# Altium PCB interface.PcbDoc (part 2 of 2)
Units mm, origin at the board's own origin, x right, y up, seen from the top; angles counter-clockwise.
Board outline 50 x 100 mm, 4 copper layers (Top Copper, GND, Supply, Bot Copper), stack 1.56 mm thick; 82 components, 62 nets, 291 pads, 101 vias.
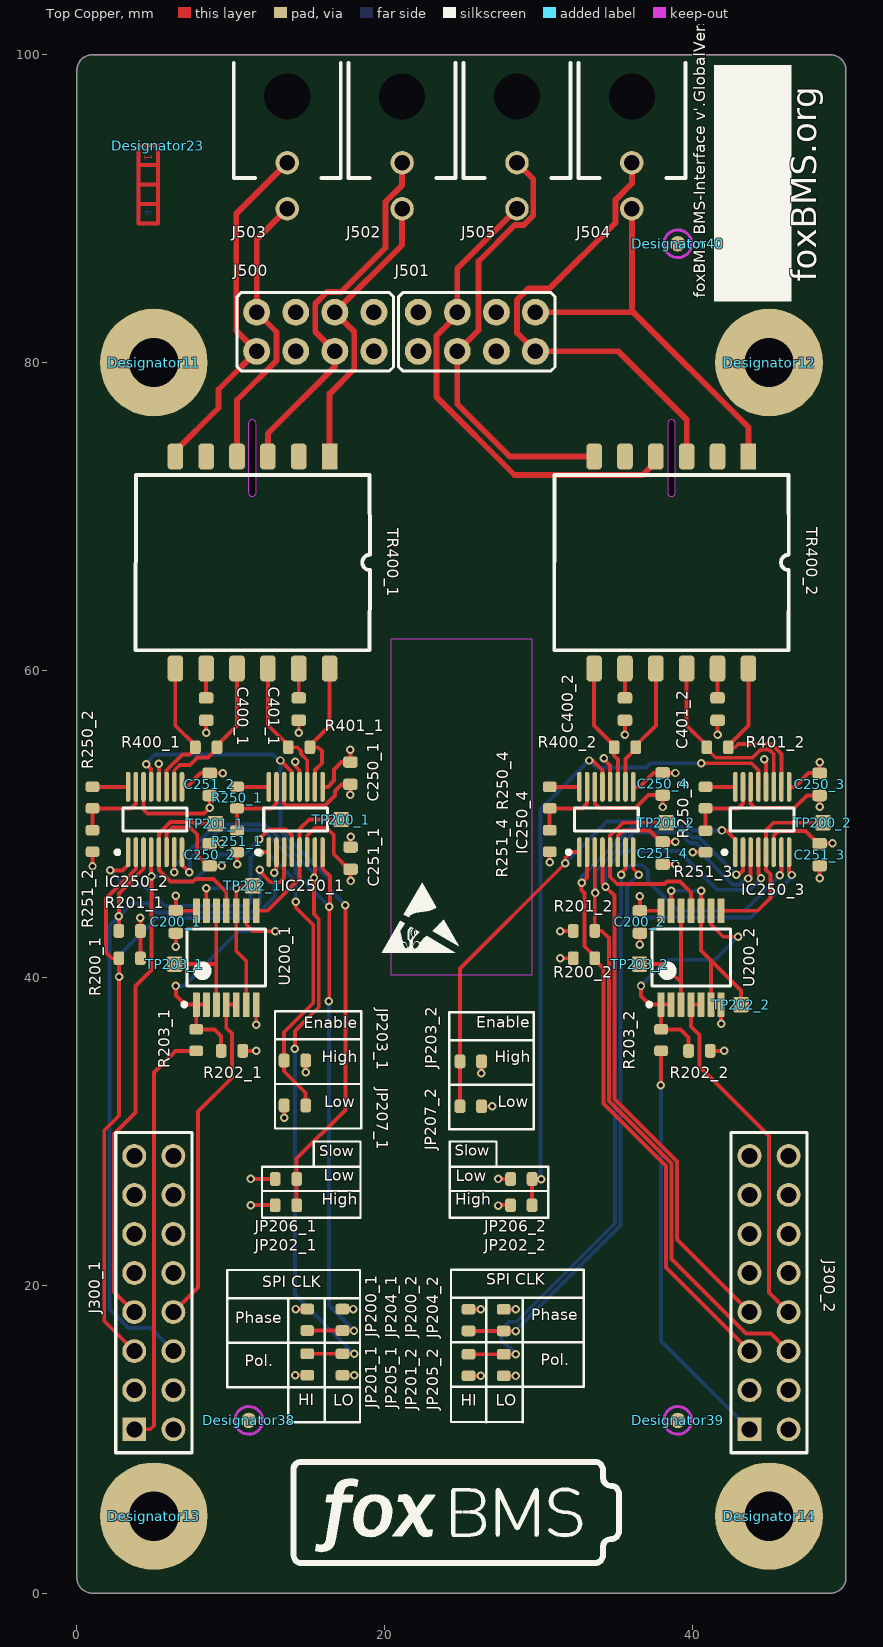
[diagram p0: Top Copper view]

## Silkscreen, mask and mechanical layers (free items; w line width, h text height) (continued)
Bottom Overlay: (continued)
  text "forward" at 37.925,87.826 h1.27
  text "foxBMS.org" at 1.524,85.217 h2.76 r270
  text "WARNING: Do not exceed 600V pack voltage with connected reverse isoSPI!" at 43,65.82 h2
  text "foxBMS BMS-Interface v'.GlobalVersion'" at 31.496,56.388 h1.27
  text "Creative Commons" at 39.216,3.15 h1.2
  text "Attribution 4.0" at 39.216,1.93 h1.2
Mechanical 1:
  lines w0: 0,1 ccw(c1,1) 1,0 49,0 ccw(c49,1) 50,1 50,99 ccw(c49,99) 49,100 1,100 ccw(c1,99) 0,99 0,1
  lines w0.5: 11.405,71.552 11.405,76.022 ; 38.655,71.552 38.655,76.022
Mechanical 21:
  lines w0: 5,5 45,5 45,80 5,80

## Dimensions
50,1 to 0,1.729 on Board_Outline
48.045,100 to 48.044,-0.022 on Board_Outline
45,80 to 39.559,99.507 on Board_Outline
5,80 to 10.196,99.507 on Board_Outline
5,80 to 45,80 on Board_Outline
45,80 to 45,5 on Mechanical 7
45,5 to 5,5 on Mechanical 7

## Text inside footprints (layer, text, board x,y; h text height)
Designator23: Top Copper "1" at 4.402,93.548 h0.51 r270; GND "2" at 4.402,92.38 h0.51 r270; Bot Copper "4" at 4.402,89.509 h0.51 r270; Supply "3" at 4.402,91.11 h0.51 r270